# EAGLE board power_dist (EAGLE 9.6.0)
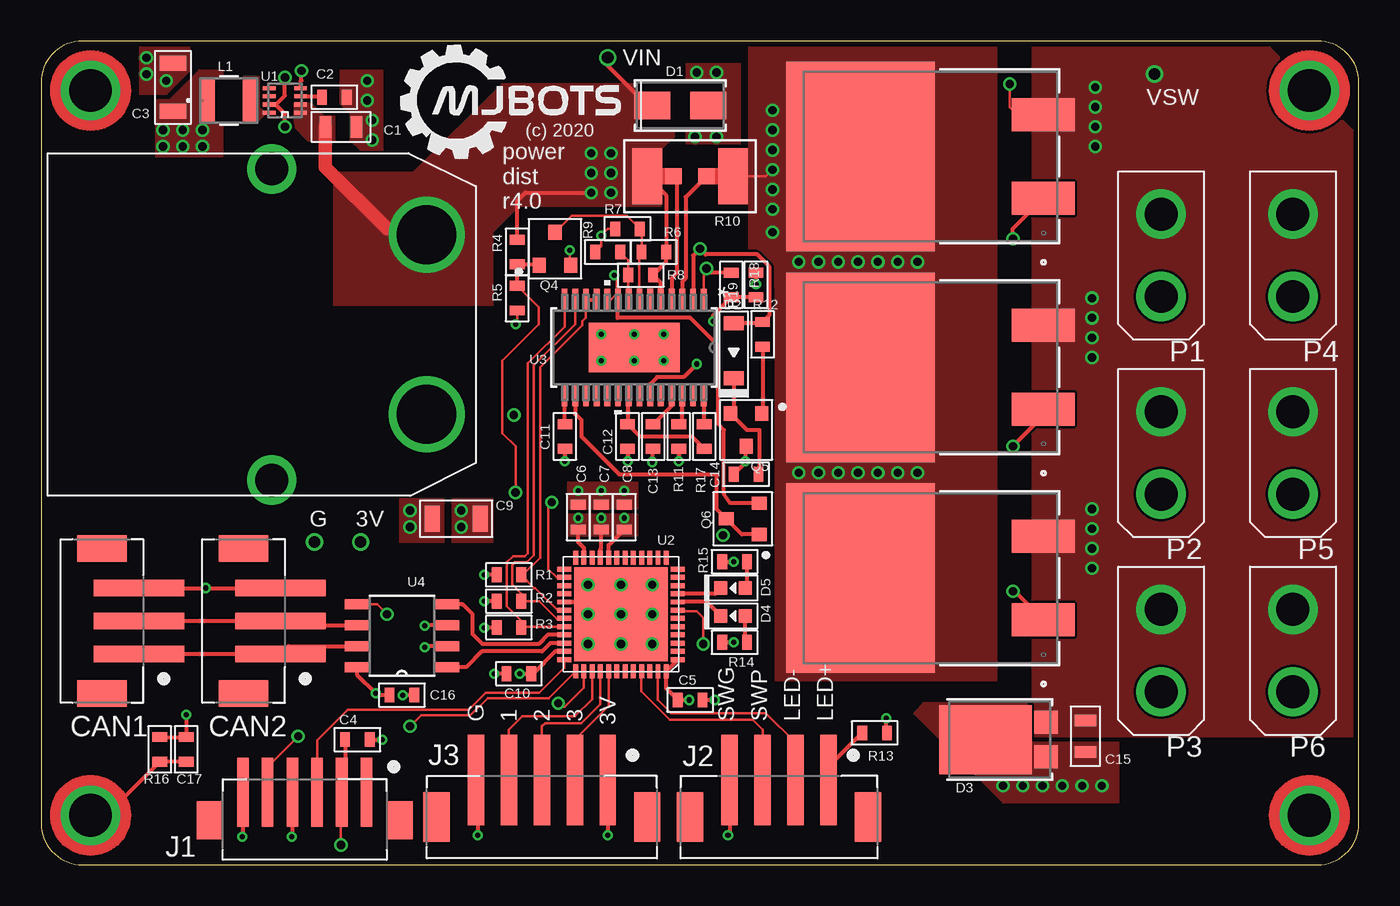
[diagram p0: board, top side]
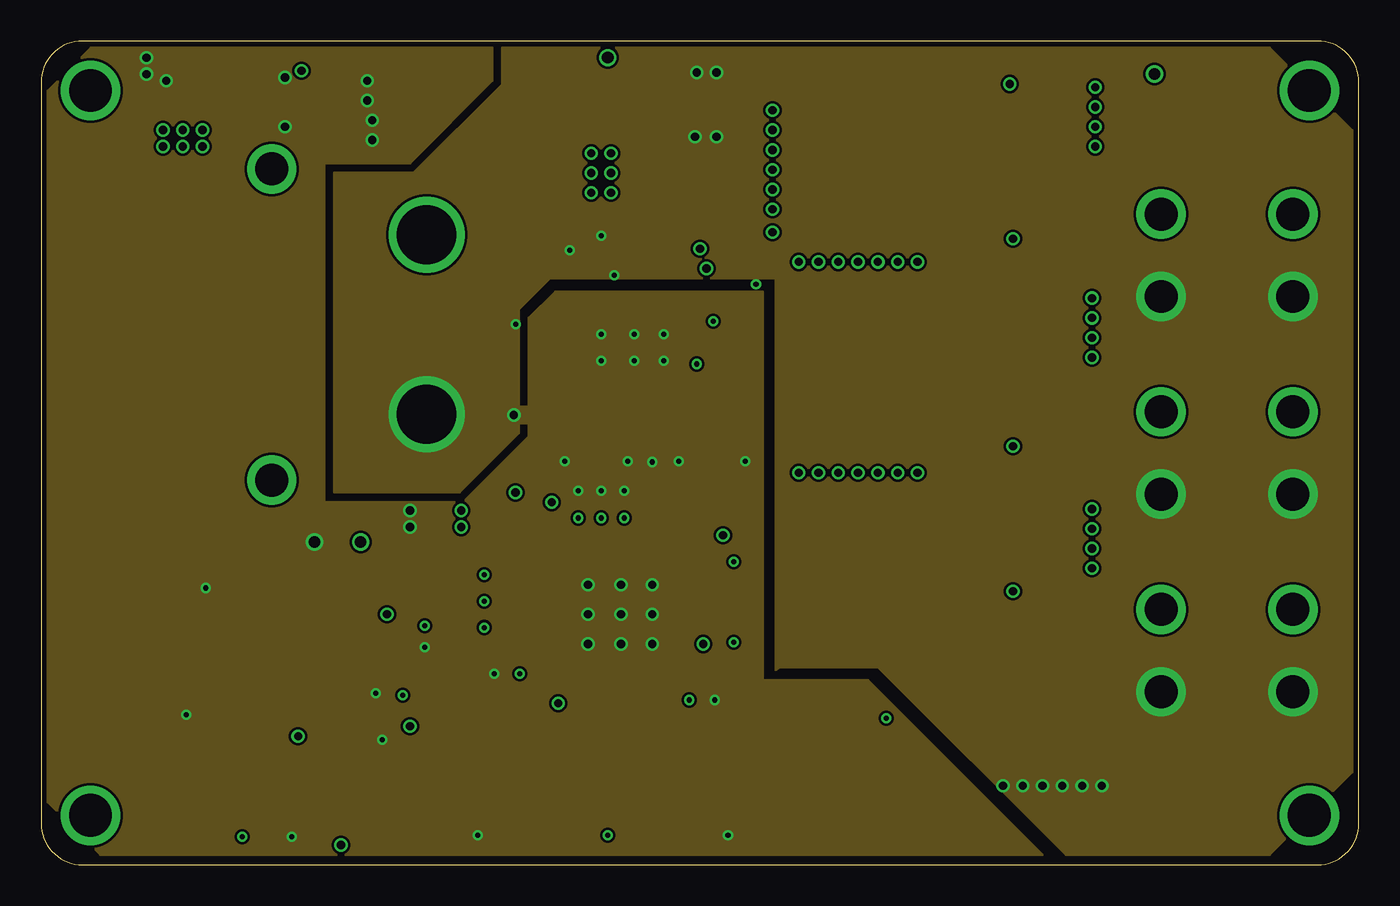
[diagram p1: board, inner layer Route2]
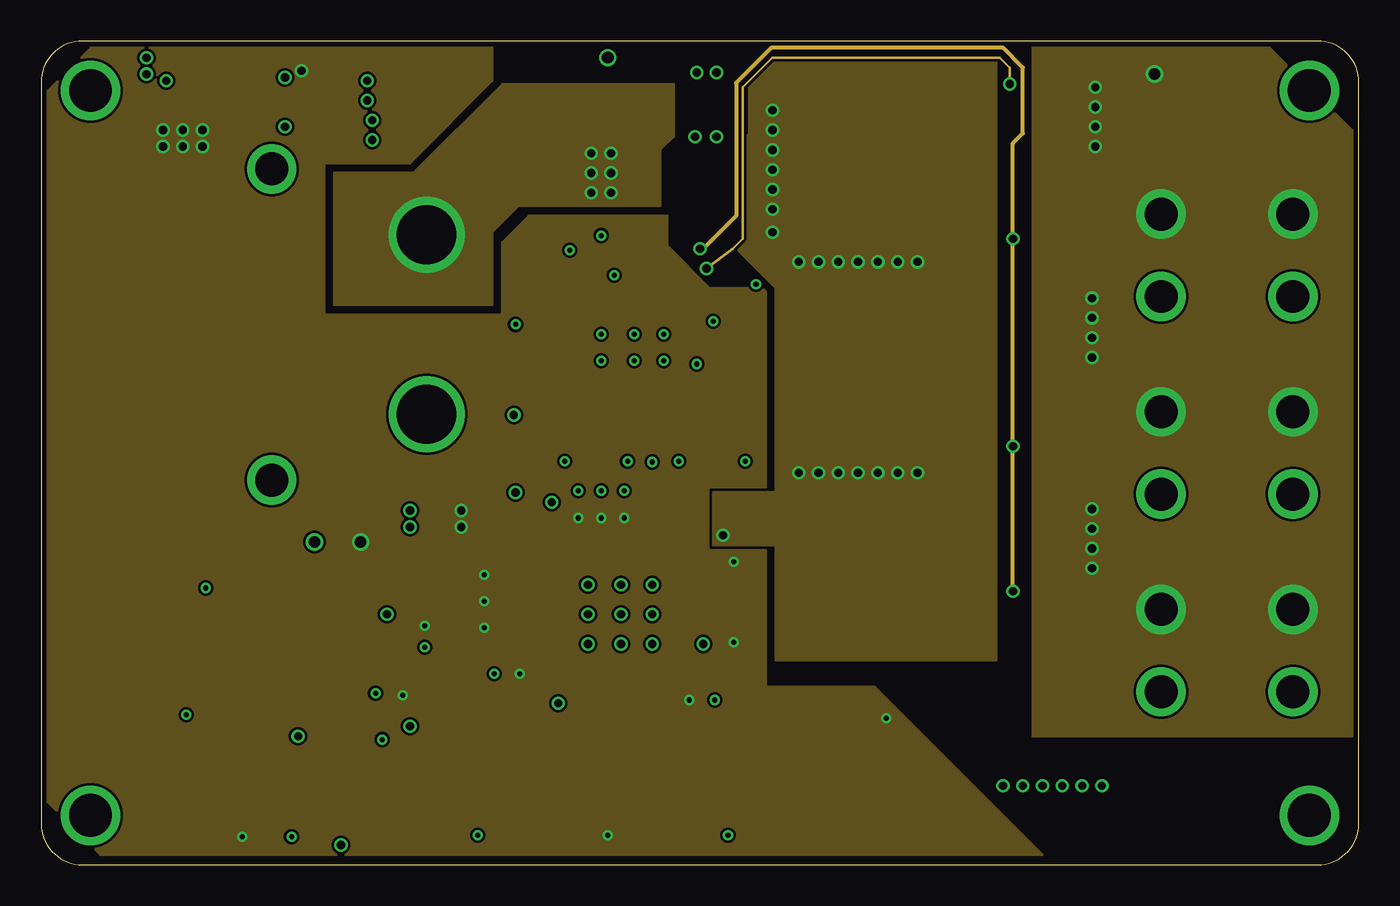
[diagram p2: board, inner layer Route15]
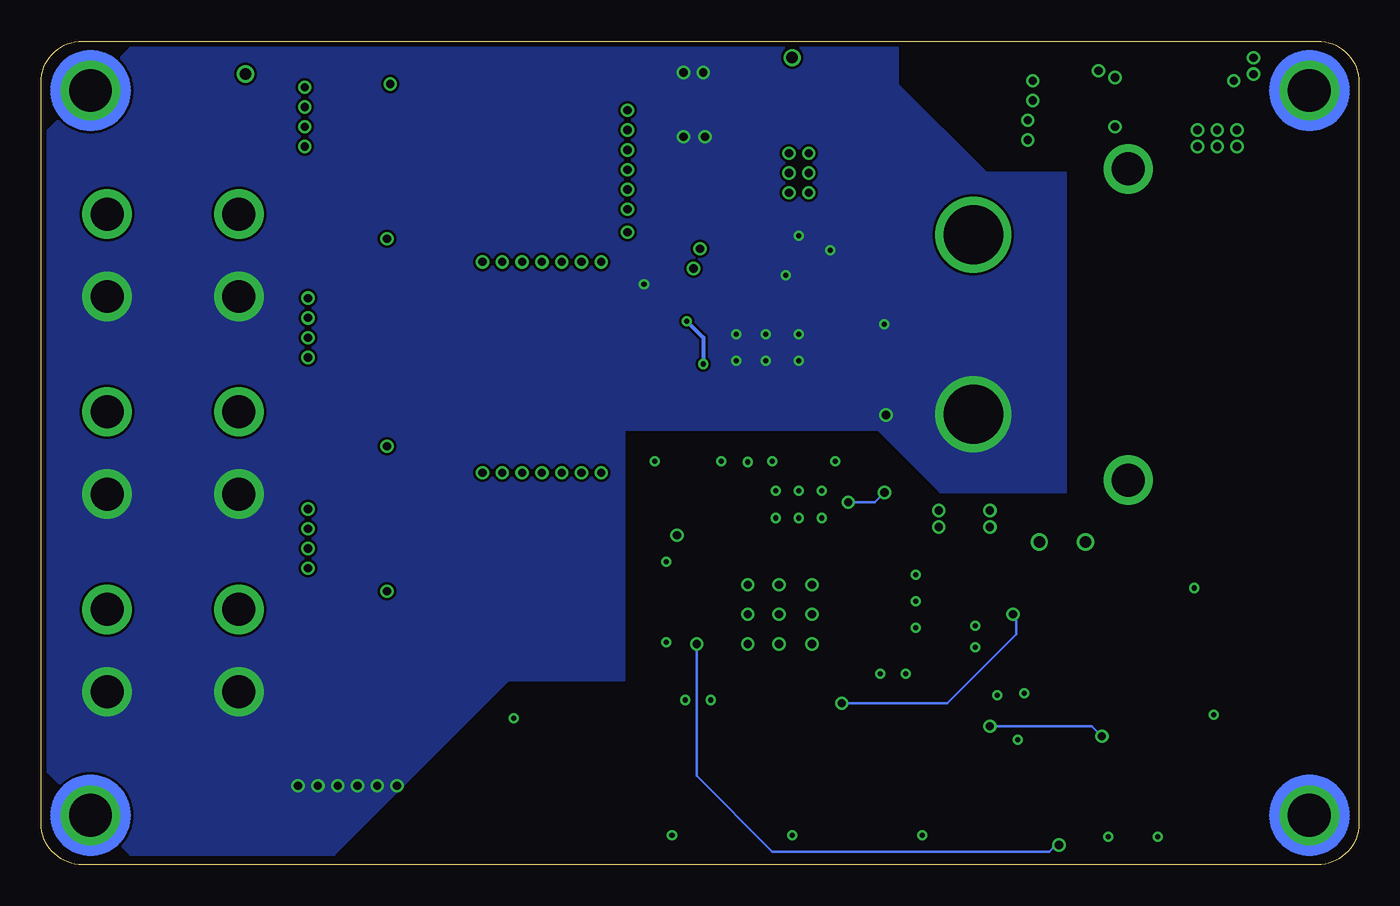
[diagram p3: board, bottom side, seen from below]

Size 80 x 50 mm. Coordinates in mm from the lower left corner, seen from the top.
Outline: 0,47.5 0,2.5 arc90 2.5,0 77.5,0 arc90 80,2.5 80,47.5 arc90 77.5,50 2.5,50 arc90 0,47.5
Copper layers (1*2*15*16): Top 0.035mm / dielectric 0.23mm / Route2 0.035mm / dielectric 0.93mm / Route15 0.035mm / dielectric 0.23mm / Bottom 0.035mm
Design rules "MF_Standard_4_Layer *": minimum track width 6mil, minimum drill 12mil, track to track 6mil, track to pad 6mil, pad to pad 6mil, via to via 6mil, smd to smd 0mil, copper to edge 10mil, drill to drill 10mil, minimum pad ring 6mil, minimum via ring 6mil, stop-mask expansion 2mil, vias tented up to drill 25mil, thermal gap 10mil
Net classes: 1 power: width 0.254 mm

## Footprints (pad centres in the part's own frame; a part is rotated, then mirrored left to right if it is on the bottom)
C0805 = smd 0.7 x 1.3: P$1 -0.95,0; P$2 0.95,0
C0603 = smd 0.6 x 0.9: P$1 -0.75,0; P$2 0.75,0
C1206 = smd 0.9 x 1.6: P$1 -1.45,0; P$2 1.45,0
JST_B3B_PH-SM4-TB(LF)(SN) = smd 1 x 5.5: 1 -2,-2.54; 2 0,-2.54; 3 2,-2.54 | smd 1.6 x 3: P1 -4.4,-0.29; P2 4.4,-0.29
DIODE_DO-214AC = smd 2.184 x 1.651: 1 -1.702,0; 2 1.702,0
SOD-123 = smd 0.85 x 1.2: ANODE 1.675,0; CATHODE -1.675,0
TO277-3L_ONS = smd 4.191 x 5.613: 1 0,0.876 | smd 1.397 x 1.448: 2 -1.05,-2.807; 3 1.05,-2.807
LED0603 = smd 0.8 x 0.8: ANODE 0.75,0; CATHODE -0.75,0
24AWG_PAD = drill 0.7: P$1 0,0
JST_B6B-ZR-SM4-TF(LF)(SN) = smd 0.7 x 4.2: 1 -3.75,-2; 2 -2.25,-2; 3 -0.75,-2; 4 0.75,-2; 5 2.25,-2; 6 3.75,-2 | smd 1.5 x 2.3: P1 -5.8,-0.29; P2 5.8,-0.29
JST_B4B_PH-SM4-TB(LF)(SN) = smd 1 x 5.5: 1 -3,-2.54; 2 -1,-2.54; 3 1,-2.54; 4 3,-2.54 | smd 1.6 x 3: P1 -5.4,-0.29; P2 5.4,-0.29
JST_B5B_PH-SM4-TB(LF)(SN) = smd 1 x 5.5: 1 -4,-2.54; 2 -2,-2.54; 3 0,-2.54; 4 2,-2.54; 5 4,-2.54 | smd 1.6 x 3: P1 -6.4,-0.29; P2 6.4,-0.29
IND_TAIYO_CBC3225_TAY = smd 0.851 x 2.692: 1 -1.276,0; 2 1.276,0
XT30P = drill 2: 1 -2.5,0; 2 2.5,0
XT90PW-M = drill 3.6: 1 -5.45,0; 2 5.45,0 | drill 2: S1 -9.45,9.4; S2 9.45,9.4
D2PAK_SOT404_NEX = smd 2.007 x 3.81: 1 -2.54,-6.845; 3 2.54,-6.845 | smd 11.506 x 8.992: 2 0,4.255
SOT-23-3 = smd 0.9 x 0.8: P$1 -1,0.95; P$2 -1,-0.95; P$3 1,0
R0603 = smd 0.6 x 0.9: P$1 -0.75,0; P$2 0.75,0
SHUNT2512 = smd 1.8 x 3.4: 1 -2.6,0; 2 2.6,0 | smd 1 x 1: 3 -1,0; 4 1,0
21-0487A_MXM = smd 0.762 x 0.254: 1 -0.953,0.75; 2 -0.953,0.25; 3 -0.953,-0.25; 4 -0.953,-0.75; 5 0.953,-0.75; 6 0.953,-0.25; 7 0.953,0.25; 8 0.953,0.75
QFN50P700X700X60-49N = smd 0.85 x 0.3: 1 -3.45,2.75; 2 -3.45,2.25; 3 -3.45,1.75; 4 -3.45,1.25; 5 -3.45,0.75; 6 -3.45,0.25; 7 -3.45,-0.25; 8 -3.45,-0.75; 9 -3.45,-1.25; 10 -3.45,-1.75; 11 -3.45,-2.25; 12 -3.45,-2.75; 25 3.45,-2.75; 26 3.45,-2.25; 27 3.45,-1.75; 28 3.45,-1.25; 29 3.45,-0.75; 30 3.45,-0.25; 31 3.45,0.25; 32 3.45,0.75; 33 3.45,1.25; 34 3.45,1.75; 35 3.45,2.25; 36 3.45,2.75 | smd 0.3 x 0.85: 13 -2.75,-3.45; 14 -2.25,-3.45; 15 -1.75,-3.45; 16 -1.25,-3.45; 17 -0.75,-3.45; 18 -0.25,-3.45; 19 0.25,-3.45; 20 0.75,-3.45; 21 1.25,-3.45; 22 1.75,-3.45; 23 2.25,-3.45; 24 2.75,-3.45; 37 2.75,3.45; 38 2.25,3.45; 39 1.75,3.45; 40 1.25,3.45; 41 0.75,3.45; 42 0.25,3.45; 43 -0.25,3.45; 44 -0.75,3.45; 45 -1.25,3.45; 46 -1.75,3.45; 47 -2.25,3.45; 48 -2.75,3.45 | smd 5.7 x 5.7: 49 0,0
MXA28A_TEX = smd 1.308 x 0.356: 1 -2.902,4.225; 2 -2.902,3.575; 3 -2.902,2.925; 4 -2.902,2.275; 5 -2.902,1.625; 6 -2.902,0.975; 7 -2.902,0.325; 8 -2.902,-0.325; 9 -2.902,-0.975; 10 -2.902,-1.625; 11 -2.902,-2.275; 12 -2.902,-2.925; 13 -2.902,-3.575; 14 -2.902,-4.225; 15 2.902,-4.225; 16 2.902,-3.575; 17 2.902,-2.925; 18 2.902,-2.275; 19 2.902,-1.625; 20 2.902,-0.975; 21 2.902,-0.325; 22 2.902,0.325; 23 2.902,0.975; 24 2.902,1.625; 25 2.902,2.275; 26 2.902,2.925; 27 2.902,3.575; 28 2.902,4.225 | smd 2.997 x 5.512: 29 0,0
SOIC8 = smd 1.549 x 0.61: 1 -2.7,1.905; 2 -2.7,0.635; 3 -2.7,-0.635; 4 -2.7,-1.905; 5 2.7,-1.905; 6 2.7,-0.635; 7 2.7,0.635; 8 2.7,1.905
M2.5MOUNT = drill 2.6: P$1 0,0

## Placement (x,y rotation side)
C1  1uF 100V  [C0805]  18.2,44.8 0 top
C2  1uF  [C0603]  17.8,46.6 0 top
C3  10uF 50V  [C1206]  8,47.2 90 top
C4  0.1uF  [C0603]  19.2,7.6 0 top
C5  0.1uF  [C0603]  39.4,10 0 top
C6  1uF  [C0603]  32.6,21.1 90 top
C7  0.1uF  [C0603]  34,21.1 90 top
C8  0.1uF  [C0603]  35.4,21.1 90 top
C9  10uF 50V  [C1206]  25.2,21 180 top
C10  0.1uF  [C0603]  29,11.6 180 top
C11  1uF  [C0603]  31.8,26 270 top
C12  1uF  [C0603]  35.6,26 270 top
C13  0.01uF  [C0603]  37.15,26 270 top
C14  0.01uF  [C0603]  42.8,23.7 180 top
C15  1uF 100V  [C0805]  63.4,7.8 270 top
C16  0.1uF  [C0603]  21.9,10.3 180 top
C17  DNP  [C0603]  8.8,7 90 top
CAN1  JST-PH3SMT_VERT  [JST_B3B_PH-SM4-TB(LF)(SN)]  3.4,14.8 90 top
CAN2  JST-PH3SMT_VERT  [JST_B3B_PH-SM4-TB(LF)(SN)]  12,14.8 90 top
D1  SMBJ51CA-E3/52  [DIODE_DO-214AC]  38.8,46.1 0 top
D2  MF-DIO-SOD123-1N4148  [SOD-123]  42.05,31.2 90 top
D3  FSV10150V  [TO277-3L_ONS]  58.2,7.6 90 top
D4  [LED0603]  42,15.1 0 top
D5  [LED0603]  42,16.8 0 top
DB_3  PAD24AWG_PAD  [24AWG_PAD]  19.4,19.6 0 top
DB_G  PAD24AWG_PAD  [24AWG_PAD]  16.6,19.6 0 top
DB_VIN  PAD24AWG_PAD  [24AWG_PAD]  34.4,49 0 top
DB_VSW  PAD24AWG_PAD  [24AWG_PAD]  67.6,48 0 top
J1  JST-ZH6SMT_VERT  [JST_B6B-ZR-SM4-TF(LF)(SN)]  16,2.4 180 top
J2  JST-PH4SMT_VERT  [JST_B4B_PH-SM4-TB(LF)(SN)]  44.8,2.6 180 top
J3  JST-PH5VERT  [JST_B5B_PH-SM4-TB(LF)(SN)]  30.4,2.6 180 top
L1  CBC3225T330KR  [IND_TAIYO_CBC3225_TAY]  11.4,46.4 0 top
P1  XT30P  [XT30P]  68,37 90 top
P2  XT30P  [XT30P]  68,25 90 top
P3  XT30P  [XT30P]  68,13 90 top
P4  XT30P  [XT30P]  76,37 90 top
P5  XT30P  [XT30P]  76,25 90 top
P6  XT30P  [XT30P]  76,13 90 top
P7  XT90PW-M  [XT90PW-M]  23.4,32.8 90 top
Q1  PSMN4R8-100BSEJ  [D2PAK_SOT404_NEX]  54,30.2 90 top
Q2  PSMN4R8-100BSEJ  [D2PAK_SOT404_NEX]  54,17.4 90 top
Q3  PSMN4R8-100BSEJ  [D2PAK_SOT404_NEX]  54,43 90 top
Q4  MF-DSC-SOT233-BSS138  [SOT-23-3]  31.2,37.4 90 top
Q5  MF-DSC-SOT233-MMBT3906  [SOT-23-3]  42.8,26.4 270 top
Q6  MF-DSC-SOT233-MMBT3904  [SOT-23-3]  42.6,21 180 top
R1  10k  [R0603]  28.4,17.6 180 top
R2  10k  [R0603]  28.4,16 180 top
R3  10k  [R0603]  28.4,14.4 180 top
R4  140k 1%  [R0603]  28.9,37.2 270 top
R5  40.2k 1%  [R0603]  28.9,34.4 270 top
R6  100k 1%  [R0603]  37.2,37.2 180 top
R7  40.2k 1%  [R0603]  35.6,38.6 180 top
R8  140k 1%  [R0603]  36.4,35.8 180 top
R9  6.49k 1%  [R0603]  34.4,37.2 180 top
R10  0.3mOhm  [SHUNT2512]  39.4,41.8 0 top
R11  24k 1%  [R0603]  38.7,26 270 top
R12  1k 1%  [R0603]  43.8,32.2 270 top
R13  220  [R0603]  50.6,8 0 top
R14  220  [R0603]  42.1,13.5 180 top
R15  220  [R0603]  42.1,18.4 180 top
R16  DNP  [R0603]  7.2,7 90 top
R17  DNP  [R0603]  40.25,26 90 top
R18  DNP  [R0603]  41.9,35.2 270 top
R19  DNP  [R0603]  43.4,35.2 90 top
U1  MAX15062AATA+T  [21-0487A_MXM]  14.8,46.4 180 top
U2  STM32G474CEU6  [QFN50P700X700X60-49N]  35.2,15.2 180 top
U3  LM5066IPMHE/NOPB  [MXA28A_TEX]  36,31.4 270 top
U4  TCAN334G  [SOIC8]  21.9,13.9 180 top
U$1  MOUNT  [M2.5MOUNT]  77,47 0 top
U$2  MOUNT  [M2.5MOUNT]  3,47 0 top
U$3  MOUNT  [M2.5MOUNT]  3,3 0 top
U$4  MOUNT  [M2.5MOUNT]  77,3 0 top

## Library data of the parts
C1 C15 = mfpassives; MF: MURATA; MPN: GCM21BC72A105KE36L; POPULATE: 1
C2 C6 C11 C12 = mfpassives; HOUSEPART: 1; MPN: MF-CAP-0603-1uF; POPULATE: 1
C3 C9 = mfpassives; MF: TDK; MPN: C3216X7R1H106K160AE; POPULATE: 1
C4 C5 C7 C8 C10 C16 = mfpassives; HOUSEPART: 1; MPN: MF-CAP-0603-0.1uF; POPULATE: 1
C13 C14 = mfpassives; HOUSEPART: 1; MPN: MF-CAP-0603-0.01uF; POPULATE: 1
C17 R16-R19 = mfpassives; POPULATE: 0
CAN1 CAN2 = precharge; MF: JST; MPN: B3B-PH-SM4-TB(LF)(SN); POPULATE: 1
D1 = power_dist; BUILT_BY: EMA_UL_Team; MANUFACTURER_PART_NUMBER: SMBJ51CA-E3/52; MPN: SMBJ51CA-E3/52; POPULATE: 1; VENDOR: Vishay
D2 = mfdiscretesemi; HOUSEPART: 1; MPN: MF-DIO-SOD123-1N4148; POPULATE: 1; URL: https://factory.macrofab.com/part/MF-DIO-SOD123-1N4148
D3 = power_dist; BUILT_BY: EMA_Jessica; COPYRIGHT: Copyright (C) 2018 Accelerated Designs. All rights reserved; MANUFACTURER_PART_NUMBER: FSV10150V; MPN: FSV10150V; POPULATE: 1; SOURCELIBRARY: ON_Semiconductor_2019-12-30; VENDOR: ON Semiconductor
D4 D5 = mfleds; HOUSEPART: 1; MPN: MF-LED-0603-RED; POPULATE: 1
DB_3 DB_G DB_VIN DB_VSW = precharge; POPULATE: 0
J1 = precharge; MF: JST; MPN: B6B-ZR-SM4-TF(LF)(SN); POPULATE: 1
J2 = precharge; MF: JST; MPN: B4B-PH-SM4-TB(LF)(SN); POPULATE: 1
J3 = power_dist; MF: JST; MPN: B5B-PH-SM4-TB(LF)(SN); POPULATE: 1
L1 = power_dist; BUILT_BY: EMA_UL_Team; MANUFACTURER_PART_NUMBER: CBC3225T330KR; MPN: CBC3225T330KR; POPULATE: 1; SOURCELIBRARY: TaiyoYuden_2011-01-01_IND_CB; VENDOR: TAIYO YUDEN
P1-P6 = precharge; MF: AMASS; MPN: XT30UPB-F; POPULATE: 1
P7 U$1-U$4 = power_dist; POPULATE: 0
Q1-Q3 = power_dist; BUILT_BY: EMA_Cory; COPYRIGHT: Copyright (C) 2018 Accelerated Designs. All rights reserved; DATASHEET: https://assets.nexperia.com/documents/data-sheet/PSMN4R8-100BSE.pdf; MANUFACTURER_PART_NUMBER: PSMN4R8-100BSEJ; MPN: PSMN4R8-100BSEJ; POPULATE: 1; SOURCELIBRARY: Nexperia_2020-02-27; VENDOR: Nexperia
Q4 = mfdiscretesemi; HOUSEPART: 1; MPN: MF-DSC-SOT233-BSS138; POPULATE: 1; URL: https://factory.macrofab.com/part/MF-DSC-SOT233-BSS138
Q5 = mfdiscretesemi; HOUSEPART: 1; MPN: MF-DSC-SOT233-MMBT3906; POPULATE: 1; URL: https://factory.macrofab.com/part/MF-DSC-SOT233-MMBT3906
Q6 = mfdiscretesemi; HOUSEPART: 1; MPN: MF-DSC-SOT233-MMBT3904; POPULATE: 1; URL: https://factory.macrofab.com/part/MF-DSC-SOT233-MMBT3904
R1-R3 = mfpassives; HOUSEPART: 1; MPN: MF-RES-0603-10K; POPULATE: 1
R4 R8 = mfpassives; MF: YAGEO; MPN: RC0603FR-07140KL; POPULATE: 1
R5 R7 = mfpassives; MF: YAGEO; MPN: RC0603FR-0740K2L; POPULATE: 1
R6 = mfpassives; MF: YAGEO; MPN: RC0603FR-07100KL; POPULATE: 1
R9 = mfpassives; MF: YAGEO; MPN: RC0603FR-076K49L; POPULATE: 1
R10 = power_dist; MF: VISHAY DALE; MPN: WSLF2512L3000FEA; POPULATE: 1
R11 = mfpassives; MF: YAGEO; MPN: RC0603FR-0724KL; POPULATE: 1
R12 = mfpassives; MF: YAGEO; MPN: RC0603FR-071KL; POPULATE: 1
R13-R15 = mfpassives; HOUSEPART: 1; MPN: MF-RES-0603-220; POPULATE: 1
U1 = power_dist; BUILT_BY: EMA_Jessica; COPYRIGHT: Copyright (C) 2018 Accelerated Designs. All rights reserved; MANUFACTURER_PART_NUMBER: MAX15062AATA+T; MPN: MAX15062AATA+T; POPULATE: 1; REVISION: 1; SOURCELIBRARY: Maxim_DP_2018-06-12; VENDOR: Maxim Integrated Products
U2 = precharge; DESCRIPTION: STMICROELECTRONICS - STM32G474CEU6 - MCU, 32BIT, 170MHZ, UFQFPN-48; HEIGHT: 0.6mm; MANUFACTURER_NAME: STMicroelectronics; MANUFACTURER_PART_NUMBER: STM32G474CEU6; MF: ST; MOUSER_PART_NUMBER: 511-STM32G474CEU6; MOUSER_PRICE-STOCK: https://www.mouser.com/Search/Refine.aspx?Keyword=511-STM32G474CEU6; MPN: STM32G474CEU6; POPULATE: 1
U3 = power_dist; BUILT_BY: EMA_UL_Team; MANUFACTURER: Texas Instruments; MANUFACTURER_PART_NUMBER: LM5066IPMHE/NOPB; MF: TI; MPN: LM5066IPMHE/NOPB; POPULATE: 1; SOURCELIBRARY: TI_2016-05-20; VENDOR: Texas Instruments
U4 = precharge; MF: Analog; MPN: LTC2875IS8; POPULATE: 1

## Nets
+24V: C1.P$1 D1.1 DB_VIN.P$1 P7.2 R4.P$1 R6.P$1 R8.P$1 R10.1 U1.1 U1.2 U3.5
CAN_N: CAN1.2 CAN2.2 U4.6
CAN_P: CAN1.1 CAN2.1 U4.7
CAN_RX: U2.33 U4.4
CAN_SHDN: U2.38 U4.5
CAN_TX: U2.34 U4.1
GND: C1.P$2 C2.P$2 C3.P$2 C4.P$2 C5.P$2 C6.P$2 C7.P$2 C8.P$2 C9.P$2 C10.P$2 C11.P$2 C12.P$2 C13.P$2 C14.P$2 C15.P$2 C16.P$2 C17.P$2 CAN1.3 CAN2.3 D1.2 D3.1 D3.2 DB_G.P$1 J1.4 J2.4 J3.5 P1.1 P2.1 P3.1 P4.1 P5.1 P6.1 P7.1 Q4.P$2 Q5.P$3 Q6.P$2 R5.P$2 R7.P$2 R9.P$2 R11.P$2 R16.P$2 R19.P$2 U1.7 U2.29 U2.49 U3.9 U3.10 U4.2 U4.8
GPIO1: J3.4 U2.39
GPIO2: J3.3 U2.40
GPIO3: J3.2 U2.41
LED1: D4.CATHODE U2.8
LED2: D5.CATHODE U2.9
N$1: L1.2 U1.8
N$2: J2.1 R13.P$1
N$3: Q6.P$1 Q6.P$3 U3.16
N$4: C2.P$1 U1.3
N$5: D2.ANODE Q1.1 Q2.1 Q3.1 R12.P$1 U3.2
N$6: R18.P$2 R19.P$1 U3.23
N$7: C11.P$1 U3.15
N$8: D4.ANODE R14.P$1
N$9: Q4.P$3 R6.P$2 R7.P$1 U3.7
N$10: R11.P$1 U3.26
N$11: C13.P$1 U3.25
N$12: R17.P$2 U3.28
N$13: C14.P$1 D2.CATHODE Q5.P$2
N$14: D5.ANODE R15.P$1
N$15: C17.P$1 R16.P$1 U$3.P$1
N$16: Q5.P$1 R12.P$2
NRST: C4.P$1 J1.2 U2.7
PSHDN: Q4.P$1 R4.P$2 R5.P$1 U2.26
PWR_LED: J2.2 U2.47
PWR_SW: J2.3 U2.45
SCL: R2.P$1 U2.31 U3.13
SDA: R1.P$1 U2.30 U3.11 U3.12
SMBA: R3.P$1 U2.32 U3.14
SWCLK: J1.5 U2.37
SWDIO: J1.3 U2.36
VCC [power]: C3.P$1 C5.P$1 C6.P$1 C7.P$1 C8.P$1 C9.P$1 C10.P$1 C16.P$1 DB_3.P$1 J1.6 J3.1 L1.1 R1.P$2 R2.P$2 R3.P$2 R13.P$2 R14.P$2 R15.P$2 U1.4 U2.1 U2.20 U2.21 U2.23 U2.35 U2.48 U4.3
VDD: C12.P$1 R17.P$1 U3.21
VIN_POST: Q1.2 Q2.2 Q3.2 R10.2
VIN_SENSE: R8.P$2 R9.P$1 U3.8
VSENSE_HIGH: R10.3 U3.4
VSENSE_LOW: R10.4 U3.3
VSWITCHED: C15.P$1 D3.3 DB_VSW.P$1 P1.2 P2.2 P3.2 P4.2 P5.2 P6.2 Q1.3 Q2.3 Q3.3 R18.P$1 U3.1

## Tracks (layer width: path | path; a pad name or v marks a point on that pad's centre or on a via)
+24V  (via drill 0.5)
  Top 0.254: R4.P$1 28.9,40.3 29.4,40.8 v33.4,40.8 | U3.5 37.62,35.33 R8.P$1 37.95,36.6 R6.P$1 37.95,40.65 R10.1 | D1.1 36.42,46.77 36.12,46.77 34.4,48.5 DB_VIN.P$1
  Top 0.813: C1.P$1 17.25,42.35 21,38.6 23.05,38.6 P7.2
  other vias: 34.6,43.2 34.6,42 34.6,40.8 33.4,43.2 33.4,42
  pour Route15 (no thermals): 17.8,42 22.6,42 28,47.4 38.4,47.4 38.4,44.2 37.6,43.4 37.6,40 29,40 27.4,38.4 27.4,34 17.8,34
  pour Top (no thermals): 17.8,42 22.6,42 28,47.4 38.4,47.4 38.4,44.2 37.6,43.4 37.6,40 29,40 27.4,38.4 27.4,34 17.8,34
  pour Top (no thermals): 15.4,46.2 16.4,46.2 17.2,45.4 17.8,45.4 17.8,44 16.2,44 15.4,44.8
CAN_N
  Top 0.254: CAN1.2 CAN2.2 14.8,14.54 U4.6
CAN_P
  Top 0.254: CAN1.1 CAN2.1 15.01,13.27 U4.7
CAN_RX
  Top 0.254: U2.33 30.75,13.95 30.2,13.4 26.8,13.4 26.2,14 26.2,15.2 25.59,15.8 U4.4
CAN_SHDN  (via drill 0.5)
  Top 0.152: U2.38 32.95,10.75 31.8,9.6 31.6,9.6 v31.4,9.8 | v21,15.2 20.39,15.8 U4.5
  Bottom 0.152: v31.4,9.8 25,9.8 20.8,14 20.8,15 v21,15.2
CAN_TX
  Top 0.254: U2.34 30.92,13.45 30.42,12.95 26.75,12.95 25.8,11.99 U4.1
GND  (via drill 0.3, 0.5)
  Top 0.152: U3.9 34.95,34.38 34.95,35.65 v34.8,35.8 35,35.6 35,34.73 34.58,34.3 U3.10 | R9.P$2 34,37.55 v34,38.2 34.4,38.6 R7.P$2 | Q4.P$2 32.1,36.45 v32.1,37.3 | R5.P$2 28.9,32.9 v28.8,32.8
  Top 0.254: v14.8,44.8 14.8,45.6 14.25,46.15 | U1.7 14.25,46.15 | 14.25,46.15 14.8,46.7 v14.8,47.8 | C13.P$2 37.1,25.2 v37.1,24.45 | R11.P$2 v38.7,24.5 | C12.P$2 v35.6,24.5 | C11.P$2 v31.8,24.5 | U4.2 23.36,13.27 v23.3,13.2 | C10.P$2 v27.5,11.6 | U2.29 32.45,15.95 v33.2,15.2 | C5.P$2 v40.9,10 | J2.4 41.8,1.9 v41.7,1.8 | J3.5 26.5,5.04 v26.5,1.8 | J1.4 15.25,1.75 v15.2,1.7 | C4.P$2 v20.7,7.6 | CAN2.3 v10,16.8 CAN1.3 | C16.P$2 20.4,10.3 v20.3,10.4 19.2,11.5 U4.8 | Q6.P$2 41.85,21.95 41.45,22.51 41.45,26.39 41.1,26.8 41.1,31.5 39.4,33.2 35,33.2 35,34.28 U3.9 | v8.8,9.1 C17.P$2 R16.P$2 | Q5.P$3 42.75,25.35 v42.75,24.5 42.75,24.4 C14.P$2 | R19.P$2 v43.4,35.25
  other vias: 28.7,27.3 20.1,45.2 19.8,46.4 19.8,47.6 20.1,44 6.4,49 6.4,48 7.6,47.6 35.4,22.7 34,22.7 32.6,22.7 33.2,17 35.2,17 37.1,17 35.2,15.2 37.1,15.2 37.1,13.4 35.2,13.4 33.2,13.4 22.4,21.5 22.4,20.5 39.8,48.1 41,48.1 39.7,44.2 41,44.2 58.4,4.8 59.6,4.8 60.8,4.8 62,4.8 63.2,4.8 64.4,4.8 34,32.2 36,32.2 37.8,32.2 36,30.6 34,30.6 37.8,30.6
  pour Route2 (no thermals): 28,49.6 74.6,49.6 79.6,44.6 79.6,5.6 74.6,0.6 62.2,0.6 50.8,12 44.8,12 44.6,11.8 44.6,35.6 30.9,35.6 29,33.7 29,26.2 25.4,22.6 17.8,22.6 17.8,42 22.6,42 28,47.4
  pour Bottom (no thermals): 28,49.6 74.6,49.6 79.6,44.6 79.6,5.6 74.6,0.6 62.2,0.6 51.6,11.2 44.6,11.2 44.6,26.4 29.2,26.4 25.4,22.6 17.8,22.6 17.8,42 22.6,42 28,47.4
  pour Route2 (rank 3, no thermals): 0.4,3.8 0.4,47 3,49.6 27.4,49.6 27.4,47.6 22.4,42.6 17.2,42.6 17.2,22 25.6,22 29.6,26 29.6,33.2 31.2,34.8 43.8,34.8 43.8,11.2 50.2,11.2 60.8,0.6 3.6,0.6
  pour Route2 (no thermals): 28.4,27.8 30.4,27.8 30.4,26.8 28.4,26.8
  pour Top (no thermals): 18.8,44 18.8,45.6 18.2,46.2 18.2,48.2 20.7,48.2 20.7,43.4 19.4,43.4
  pour Top (no thermals): 6,49.6 9,49.6 9,48.2 7.6,46.8 6,46.8
  pour Top (no thermals): 32,23.2 36.2,23.2 36.2,21.65 32,21.65
  pour Top (no thermals): 21.8,22.2 24.4,22.2 24.4,19.6 21.8,19.6
  pour Top (no thermals): 39.2,48.6 42.4,48.6 42.4,43.8 39.2,43.8
  pour Top (no thermals): 53,9.2 58.4,3.8 59.2,3.8 65.4,3.8 65.4,7.4 59.8,7.4 59.8,9.8 53.6,9.8
GPIO1
  Top 0.152: U2.39 33.45,10.05 32.4,9 29.2,9 28.4,8.2 J3.4
GPIO2
  Top 0.152: U2.40 33.95,9.75 32.8,8.6 30.6,8.6 30.4,8.4 J3.3
GPIO3
  Top 0.152: U2.41 34.45,9.65 32.4,7.6 J3.2
LED1
  Top 0.254: D4.CATHODE 40.4,15.95 U2.8
LED2
  Top 0.254: D5.CATHODE 40.9,16.45 U2.9
N$1
  pour Top (no thermals): 12.2,47.8 13.2,47.8 13.2,46 13.5,45.7 14.1,45.7 14.1,45.6 13.6,45.6 13.1,45.1 12.2,45.1
N$2
  Top 0.254: R13.P$1 47.8,5.95 J2.1
N$3
  Top 0.254: Q6.P$1 42.55,20.05 Q6.P$3 41,21.6 41,23.7 35.1,23.7 32.8,26 32.8,27 32.42,27.38 U3.16
N$4
  Top 0.254: U1.3 17,46.65 C2.P$1
N$5  (via drill 0.5)
  Top 0.254: Q2.1 59.1,16.6 v59,16.6 | v59,25.4 60.84,27.25 Q1.1 | v59,38 59,38.62 Q3.1 | U3.2 39.58,36.98 v40,37.4 40.34,37.06 43.47,37.06 44.2,36.33 44.2,33.35 R12.P$1 43.73,32.88 D2.ANODE
  Route15 0.254: v59,16.6 v59,25.4 v59,38 59,43.8 59.6,44.4 59.6,48.4 58.4,49.6 44.33,49.6 42.2,47.47 42.2,39.4 40.2,37.4 v40,37.4
N$6  (via drill 0.3)
  Top 0.254: R19.P$1 R18.P$2 40.8,33.35 v40.8,33 | v39.8,30.4 39,29.6 37.4,29.6 36.98,29.18 U3.23
  Bottom 0.254: v40.8,33 39.8,32 v39.8,30.4
N$7
  Top 0.254: C11.P$1 31.77,26.77 U3.15
N$8
  Top 0.254: R14.P$1 42.75,13.6 D4.ANODE
N$9
  Top 0.152: U3.7 36.33,37.08 R6.P$2 36.45,38.5 R7.P$1 35.55,39.4 32.2,39.4 Q4.P$3
N$10
  Top 0.254: R11.P$1 38.92,26.98 U3.26
N$11
  Top 0.254: C13.P$1 38.27,27.88 U3.25
N$12
  Top 0.254: U3.28 40.23,26.77 R17.P$2
N$13
  Top 0.254: D2.CATHODE 42.05,27.6 Q5.P$2 42.85,26.4 43.6,26.4 43.6,23.75 C14.P$1
N$14
  Top 0.254: R15.P$1 42.85,16.9 D5.ANODE
N$15
  Top 0.254: C17.P$1 R16.P$1 3.95,3 U$3.P$1
N$16
  Top 0.254: R12.P$2 43.8,27.45 Q5.P$1
NRST  (via drill 0.5)
  Top 0.152: U2.7 38.7,15.4 39.8,15.4 40.2,15 v40.2,13.4 | v18.2,1.2 18.2,4.35 J1.2
  Top 0.254: C4.P$1 18.45,4.6 J1.2
  Bottom 0.152: v40.2,13.4 40.2,5.4 35.6,0.8 18.8,0.8 18.4,1.2 v18.2,1.2
PSHDN  (via drill 0.5)
  Top 0.152: U2.26 31.29,17.45 30.8,17.94 30.8,22 v31,22 | v28.8,22.6 28.8,25.4 28,26.2 28,30.6 30.2,32.8 30.2,33.85 R5.P$1
  Top 0.254: R5.P$1 R4.P$2 30.2,36.45 Q4.P$1
  Bottom 0.152: v31,22 29.4,22 v28.8,22.6
PWR_LED
  Top 0.152: U2.47 37.45,10.02 38.26,9.2 44,9.2 45.8,7.4 J2.2
PWR_SW
  Top 0.152: U2.45 36.45,10.52 38.17,8.8 43.2,8.8 43.8,8.2 J2.3
SCL
  Top 0.152: U2.31 31.29,14.95 30.24,16 R2.P$1 29.15,16.46 28.6,17.02 28.6,18.18 28.77,18.35 29.47,18.35 29.92,18.8 29.92,30.32 32.42,32.82 U3.13
SDA
  Top 0.152: U2.30 31.35,15.45 30,16.8 29.95,16.8 R1.P$1 29.25,17.6 30.3,18.65 30.3,30.2 32.84,32.74 32.84,32.98 33.08,33.22 U3.12
  Top 0.254: U3.12 U3.11
SMBA
  Top 0.152: U2.32 29.2,14.45 R3.P$1 29.15,14.81 28.27,15.7 28.27,18.35 28.65,18.73 29.37,18.73 29.54,18.9 29.54,30.43 31.77,32.66 U3.14
SWCLK  (via drill 0.5)
  Top 0.152: U2.37 30.82,10.12 27.12,10.12 26.07,9.07 23.07,9.07 v22.4,8.4 | v15.6,7.8 14,6.2 14,4.65 J1.5
  Bottom 0.152: v22.4,8.4 16.2,8.4 v15.6,7.8
SWDIO
  Top 0.152: J1.3 16.75,7.55 18.6,9.4 25.95,9.4 27,10.45 30.25,10.45 31.75,11.95 U2.36
VCC  (via drill 0.3, 0.5)
  Top 0.254: U1.4 15.75,47.55 15.8,47.6 v15.8,48.2 | U2.23 32.95,19.23 32.6,19.58 C6.P$1 | U2.21 33.95,19.15 34,19.2 C7.P$1 | U2.20 34.45,19.4 C8.P$1 | R1.P$2 v26.9,17.6 | R2.P$2 v26.9,16 | R3.P$2 v26.9,14.4 | U4.3 23.34,14.54 v23.3,14.5 | U2.35 31.22,12.95 29.87,11.6 C10.P$1 v29.05,11.6 | U2.1 U2.48 37.95,10.7 C5.P$1 v39.35,10 | R14.P$2 v42.05,13.5 | R15.P$2 v42.05,18.4 | R13.P$2 51.3,8.05 v51.3,8.9 | J3.1 v34.4,1.8 | J1.6 12.25,1.75 v12.2,1.7 | C16.P$1 v21.95,10.3
  other vias: 7.4,44.6 8.6,44.6 7.4,43.6 8.6,43.6 9.8,44.6 9.8,43.6 32.6,21.05 34,21.05 35.4,21.05 25.5,21.5 25.5,20.5
  pour Route15 (rank 3, no thermals): 3,49.6 27.2,49.6 27.4,49.6 27.4,47.6 22.4,42.6 17.2,42.6 17.2,33.4 28,33.4 28,37.8 29.6,39.4 38,39.4 38,37.6 40.6,35 43.8,35 44,34.8 44,10.8 50.6,10.8 60.8,0.6 3.6,0.6 0.4,3.8 0.4,47
  pour Top (no thermals): 7,46.4 7.8,46.4 9.6,48.2 11,48.2 11,43 7,43
  pour Top (no thermals): 32,21.25 36.2,21.25 36.2,20 32,20
  pour Top (no thermals): 25,22.2 27.4,22.2 27.4,19.6 25,19.6
VDD
  Top 0.254: U3.21 35.6,28.42 C12.P$1 36.35,26 39.5,26 R17.P$1
VIN_POST  (via drill 0.5)
  Top 0.152: v44.4,42.2 44,41.8 42.1,41.8 42.1,42.09 41.69,42.5 41.4,42.5 41.4,42.4 R10.2
  other vias: 44.4,43.4 44.4,44.6 44.4,45.8 44.4,41 44.4,38.4 44.4,39.8 46,36.6 47.2,36.6 48.4,36.6 49.6,36.6 50.8,36.6 52,36.6 53.2,36.6 46,23.8 47.2,23.8 48.4,23.8 49.6,23.8 50.8,23.8 52,23.8 53.2,23.8 41.4,20
  pour Top (no thermals): 43,36.6 43,49.6 58,49.6 58,11.2 44.6,11.2 44.6,35
  pour Route15: 43,49.6 58,49.6 58,12.4 44.6,12.4 44.6,35 41.2,38.4 41.2,43.4 42,43.4 43,44.4
  pour Route15 (no thermals): 40.8,22.6 45.2,22.6 45.2,19.4 40.8,19.4
VIN_SENSE
  Top 0.152: R9.P$1 35.65,36.7 R8.P$2 35.65,34.33 U3.8
VSENSE_HIGH
  Top 0.254: R10.3 38.6,41.6 38.6,35.93 38.27,35.6 U3.4
VSENSE_LOW
  Top 0.254: R10.4 39.12,40.52 39.12,35.6 38.92,35.4 U3.3
VSWITCHED  (via drill 0.5)
  Top 0.152: Q3.3 59.24,45.54 58.8,45.98 v58.8,47.4 | v40.4,36.2 40.23,36.02 U3.1
  Top 0.254: R18.P$1 40.65,35.95 v40.4,36.2
  Route15 0.152: v58.8,47.4 58.8,48.4 58.2,49 44.4,49 42.6,47.2 42.6,38 42,37.4 v40.4,36.2
  other vias: 64,47.2 64,46 64,44.8 64,43.6 63.8,33.2 63.8,34.4 63.8,32 63.8,30.8 63.8,20.4 63.8,21.6 63.8,19.2 63.8,18
  pour Top (no thermals): 60.2,49.6 74.6,49.6 79.6,44.6 79.6,7.8 60.2,7.8
  pour Route15 (no thermals): 60.2,49.6 74.6,49.6 79.6,44.6 79.6,7.8 60.4,7.8 60.2,7.8

## Text on the board
tPlace: VIN | VSW | (c) 2020 | power / dist / r4.0 | G | 3V | G | 1 | 2 | 3 | SWG | SWP | LED- | LED+ | 3V